# EAGLE board CT_schematic (EAGLE 7.6.0)

Size 100 x 80 mm. Coordinates in mm from the lower left corner, seen from the top.
Outline: 0,0 100,0 100,80 0,80 0,0
Copper layers (1*16): Top 0.035mm / dielectric 1.5mm / Bottom 0.035mm
Design rules "default": minimum track width 10mil, minimum drill 24mil, track to track 8mil, track to pad 8mil, pad to pad 8mil, via to via 8mil, smd to smd 8mil, copper to edge 40mil, drill to drill 8mil, minimum pad ring 10mil, minimum via ring 8mil, stop-mask expansion 4mil, vias tented up to drill 0mil, thermal gap 10mil

## Footprints (pad centres in the part's own frame; a part is rotated, then mirrored left to right if it is on the bottom)
C0603 = smd 0.8 x 0.8: 1 -0.762,0; 2 0.762,0
C0402 = smd 0.5 x 0.5: 1 -0.508,0; 2 0.508,0
C0805 = smd 1.2 x 1.3: 1 -1.016,0; 2 1.016,0
C1206 = smd 1.3 x 1.6: 1 -1.524,0; 2 1.524,0
C1210 = smd 1.2 x 2.5: 1 -1.524,0; 2 1.524,0
EXV-9H = smd 3.505 x 1.676: 1 -2.857,0; 2 2.857,0
L0603 = smd 0.8 x 0.8: 1 -0.762,0; 2 0.762,0
R0603 = smd 0.8 x 0.8: 1 -0.762,0; 2 0.762,0
L1210 = smd 1.2 x 2.5: 1 -1.524,0; 2 1.524,0
DR1040 = smd 1.6 x 3.2: 1 -4.458,0; 2 4.458,0
PJ-037B_PACKAGE = drill 3.7 square: 1 12,0 | drill 3.2 square: 2 6,0
UFBGA176 = smd 0.3 x 0.3: A1 0,0; A2 0.65,0; A3 1.3,0; A4 1.95,0; A5 2.6,0; A6 3.25,0; A7 3.9,0; A8 4.55,0; A9 5.2,0; A10 5.85,0; A11 6.5,0; A12 7.15,0; A13 7.8,0; A14 8.45,0; A15 9.1,0; B1 0,-0.65; B2 0.65,-0.65; B3 1.3,-0.65; B4 1.95,-0.65; B5 2.6,-0.65; B6 3.25,-0.65; B7 3.9,-0.65; B8 4.55,-0.65; B9 5.2,-0.65; B10 5.85,-0.65; B11 6.5,-0.65; B12 7.15,-0.65; B13 7.8,-0.65; B14 8.45,-0.65; B15 9.1,-0.65; C1 0,-1.3; C2 0.65,-1.3; C3 1.3,-1.3; C4 1.95,-1.3; C5 2.6,-1.3; C6 3.25,-1.3; C7 3.9,-1.3; C8 4.55,-1.3; C9 5.2,-1.3; C10 5.85,-1.3; C11 6.5,-1.3; C12 7.15,-1.3; C13 7.8,-1.3; C14 8.45,-1.3; C15 9.1,-1.3; D1 0,-1.95; D2 0.65,-1.95; D3 1.3,-1.95; D4 1.95,-1.95; D5 2.6,-1.95; D6 3.25,-1.95; D7 3.9,-1.95; D8 4.55,-1.95; D9 5.2,-1.95; D10 5.85,-1.95; D11 6.5,-1.95; D12 7.15,-1.95; D13 7.8,-1.95; D14 8.45,-1.95; D15 9.1,-1.95; E1 0,-2.6; E2 0.65,-2.6; E3 1.3,-2.6; E4 1.95,-2.6; E12 7.15,-2.6; E13 7.8,-2.6; E14 8.45,-2.6; E15 9.1,-2.6; F1 0,-3.25; F2 0.65,-3.25; F3 1.3,-3.25; F4 1.95,-3.25; F6 3.25,-3.25; F7 3.9,-3.25; F8 4.55,-3.25; F9 5.2,-3.25; F10 5.85,-3.25; F12 7.15,-3.25; F13 7.8,-3.25; F14 8.45,-3.25; F15 9.1,-3.25; G1 0,-3.9; G2 0.65,-3.9; G3 1.3,-3.9; G4 1.95,-3.9; G6 3.25,-3.9; G7 3.9,-3.9; G8 4.55,-3.9; G9 5.2,-3.9; G10 5.85,-3.9; G12 7.15,-3.9; G13 7.8,-3.9; G14 8.45,-3.9; G15 9.1,-3.9; H1 0,-4.55; H2 0.65,-4.55; H3 1.3,-4.55; H4 1.95,-4.55; H6 3.25,-4.55; H7 3.9,-4.55; H8 4.55,-4.55; H9 5.2,-4.55; H10 5.85,-4.55; H12 7.15,-4.55; H13 7.8,-4.55; H14 8.45,-4.55; H15 9.1,-4.55; J1 0,-5.2; J2 0.65,-5.2; J3 1.3,-5.2; J4 1.95,-5.2; J6 3.25,-5.2; J7 3.9,-5.2; J8 4.55,-5.2; J9 5.2,-5.2; J10 5.85,-5.2; J12 7.15,-5.2; J13 7.8,-5.2; J14 8.45,-5.2; J15 9.1,-5.2; K1 0,-5.85; K2 0.65,-5.85; K3 1.3,-5.85; K4 1.95,-5.85; K6 3.25,-5.85; K7 3.9,-5.85; K8 4.55,-5.85; K9 5.2,-5.85; K10 5.85,-5.85; K12 7.15,-5.85; K13 7.8,-5.85; K14 8.45,-5.85; K15 9.1,-5.85; L1 0,-6.5; L2 0.65,-6.5; L3 1.3,-6.5; L4 1.95,-6.5; L12 7.15,-6.5; L13 7.8,-6.5; L14 8.45,-6.5; L15 9.1,-6.5; M1 0,-7.15; M2 0.65,-7.15; M3 1.3,-7.15; M4 1.95,-7.15; M5 2.6,-7.15; M6 3.25,-7.15; M7 3.9,-7.15; M8 4.55,-7.15; M9 5.2,-7.15; M10 5.85,-7.15; M11 6.5,-7.15; M12 7.15,-7.15; M13 7.8,-7.15; M14 8.45,-7.15; M15 9.1,-7.15; N1 0,-7.8; N2 0.65,-7.8; N3 1.3,-7.8; N4 1.95,-7.8; N5 2.6,-7.8; N6 3.25,-7.8; N7 3.9,-7.8; N8 4.55,-7.8; N9 5.2,-7.8; N10 5.85,-7.8; N11 6.5,-7.8; N12 7.15,-7.8; N13 7.8,-7.8; N14 8.45,-7.8; N15 9.1,-7.8; P1 0,-8.45; P2 0.65,-8.45; P3 1.3,-8.45; P4 1.95,-8.45; P5 2.6,-8.45; P6 3.25,-8.45; P7 3.9,-8.45; P8 4.55,-8.45; P9 5.2,-8.45; P10 5.85,-8.45; P11 6.5,-8.45; P12 7.15,-8.45; P13 7.8,-8.45; P14 8.45,-8.45; P15 9.1,-8.45; R1 0,-9.1; R2 0.65,-9.1; R3 1.3,-9.1; R4 1.95,-9.1; R5 2.6,-9.1; R6 3.25,-9.1; R7 3.9,-9.1; R8 4.55,-9.1; R9 5.2,-9.1; R10 5.85,-9.1; R11 6.5,-9.1; R12 7.15,-9.1; R13 7.8,-9.1; R14 8.45,-9.1; R15 9.1,-9.1
SOIC-8 = smd 1.6 x 0.6: 1 -2.7,1.905 | smd 1.55 x 0.6: 2 -2.7,0.635; 3 -2.7,-0.635; 4 -2.7,-1.905; 5 2.7,-1.905; 6 2.7,-0.635; 7 2.7,0.635; 8 2.7,1.905
QFN-32 = smd 0.6 x 0.3: 1 -2.3,1.75; 2 -2.3,1.25; 3 -2.3,0.75; 4 -2.3,0.25; 5 -2.3,-0.25; 6 -2.3,-0.75; 7 -2.3,-1.25; 8 -2.3,-1.75; 17 2.3,-1.75; 18 2.3,-1.25; 19 2.3,-0.75; 20 2.3,-0.25; 21 2.3,0.25; 22 2.3,0.75; 23 2.3,1.25; 24 2.3,1.75 | smd 0.3 x 0.6: 9 -1.75,-2.3; 10 -1.25,-2.3; 11 -0.75,-2.3; 12 -0.25,-2.3; 13 0.25,-2.3; 14 0.75,-2.3; 15 1.25,-2.3; 16 1.75,-2.3; 25 1.75,2.3; 26 1.25,2.3; 27 0.75,2.3; 28 0.25,2.3; 29 -0.25,2.3; 30 -0.75,2.3; 31 -1.25,2.3; 32 -1.75,2.3 | smd 3.2 x 3.2: EXP 0,0
7498011122R = smd 0.71 x 2.29: 1 -3.545,-3.18; 2 -2.525,-3.18; 3 -1.505,-3.18; 4 -0.485,-3.18; 5 0.535,-3.18; 6 1.555,-3.18; 8 3.595,-3.18; 9 5.635,-3.18; 10 6.655,-3.18; 11 -6.605,-3.18; 12 -5.585,-3.18 | smd 1.4 x 2.54: 13 -8.51,10.2; 14 8.51,10.2 | hole 1.4: -3.5,0; 3.5,0
SSOP-16 = smd 1.981 x 0.356: 1 -2.464,2.223; 2 -2.464,1.587; 3 -2.464,0.953; 4 -2.464,0.318; 5 -2.464,-0.318; 6 -2.464,-0.953; 7 -2.464,-1.587; 8 -2.464,-2.223; 9 2.464,-2.223; 10 2.464,-1.587; 11 2.464,-0.953; 12 2.464,-0.318; 13 2.464,0.318; 14 2.464,0.953; 15 2.464,1.587; 16 2.464,2.223
HTSS-105-01-G-D = drill 1 pad 1.8 square: 1 0,0 | drill 1 pad 1.8: 2 0,2.54; 3 2.54,0; 4 2.54,2.54; 5 5.08,0; 6 5.08,2.54; 7 7.62,0; 8 7.62,2.54; 9 10.16,0; 10 10.16,2.54
VFBGA-63 = smd 0.4 x 0.4: A1 -3.6,4.4; A2 -2.8,4.4; A9 2.8,4.4; A10 3.6,4.4; B1 -3.6,3.6; B9 2.8,3.6; B10 3.6,3.6; C3 -2,2.8; C4 -1.2,2.8; C5 -0.4,2.8; C6 0.4,2.8; C7 1.2,2.8; C8 2,2.8; D3 -2,2; D4 -1.2,2; D5 -0.4,2; D6 0.4,2; D7 1.2,2; D8 2,2; E3 -2,1.2; E4 -1.2,1.2; E5 -0.4,1.2; E6 0.4,1.2; E7 1.2,1.2; E8 2,1.2; F3 -2,0.4; F4 -1.2,0.4; F5 -0.4,0.4; F6 0.4,0.4; F7 1.2,0.4; F8 2,0.4; G3 -2,-0.4; G4 -1.2,-0.4; G5 -0.4,-0.4; G6 0.4,-0.4; G7 1.2,-0.4; G8 2,-0.4; H3 -2,-1.2; H4 -1.2,-1.2; H5 -0.4,-1.2; H6 0.4,-1.2; H7 1.2,-1.2; H8 2,-1.2; J3 -2,-2; J4 -1.2,-2; J5 -0.4,-2; J6 0.4,-2; J7 1.2,-2; J8 2,-2; K3 -2,-2.8; K4 -1.2,-2.8; K5 -0.4,-2.8; K6 0.4,-2.8; K7 1.2,-2.8; K8 2,-2.8; L1 -3.6,-3.6; L2 -2.8,-3.6; L9 2.8,-3.6; L10 3.6,-3.6; M1 -3.6,-4.4; M2 -2.8,-4.4; M9 2.8,-4.4; M10 3.6,-4.4
SJ-43515TS-SMT-TR = smd 2.2 x 3: 1 0.6,-7.4; 4 3.4,-7.4 | smd 3 x 3: 2 12.8,-7.4; 5 17,-3 | smd 2 x 3: 3 5.3,0; 6 2.5,0 | drill 1.8: P$7 4.5,-3.69; P$8 11.54,-3.69
WM-64PC = drill 0.6 pad 1: 1 -1,0.95; 2 -1,-0.95
ABLS-25.000MHZ-B2F-T = smd 5.6 x 2.8: 1 -3.81,0; 2 5.69,0
ASEK = smd 1.4 x 1: 1 -1.1,-0.8; 2 1.1,-0.8; 3 1.1,0.8; 4 -1.1,0.8
ASFL1 = smd 1.7 x 1.5: 1 -1.27,-1.1; 2 1.27,-1.1; 3 1.27,1.1; 4 -1.27,1.1
IDT74FCT38072 = smd 0.51 x 1: 1 0,0; 2 1.27,0; 3 2.54,0; 4 3.81,0; 5 3.81,4.95; 6 2.54,4.95; 7 1.27,4.95; 8 0,4.95
WSON-8 = smd 0.3 x 0.6: 1 -0.75,0; 2 0.05,0; 3 0.85,0; 4 1.65,0; 5 1.65,3.8; 6 0.85,3.8; 7 0.05,3.8; 8 -0.75,3.8 | smd 3 x 2.6: PAD 0.45,1.9
HTSSOP14 = smd 1.676 x 0.356: 1 -2.8,1.95; 2 -2.8,1.3; 3 -2.8,0.65; 4 -2.8,0; 5 -2.8,-0.65; 6 -2.8,-1.3; 7 -2.8,-1.95; 8 2.8,-1.95; 9 2.8,-1.3; 10 2.8,-0.65; 11 2.8,0; 12 2.8,0.65; 13 2.8,1.3; 14 2.8,1.95 | smd 3 x 5: 15 0,0 | drill 0.4 pad 0.45: P$1 -0.75,1.5; P$2 0.75,1.5; P$3 -0.75,0; P$4 0.8,0; P$5 -0.75,-1.5; P$6 0.9,-1.5
SON-6 = smd 0.55 x 0.3: 1 -0.355,0.5 | smd 0.52 x 0.3: 2 -0.37,0; 3 -0.37,-0.5; 4 0.37,-0.5; 5 0.37,0; 6 0.37,0.5
SW_4-1437565-2 = smd 1.4 x 2.1: 1 -2.23,4.55; 2 -2.23,-4.55; 3 2.23,4.55; 4 2.23,-4.55
LGM67K-G1J2-24-Z = smd 0.8 x 1.4: A -2,0; C 0,0
NC7SZ125M5X = smd 1.3 x 0.7: 1 -1.3,0.95; 2 -1.3,0; 3 -1.3,-0.95; 4 1.3,-0.95; 5 1.3,0.95

## Placement (x,y rotation side)
C1  1e-06  [C0603]  -72.39,90.17 0 top  (outside the outline)
C2  1e-07  [C0603]  -76.2,90.17 0 top  (outside the outline)
C3  1e-07  [C0603]  -80.01,90.17 0 top  (outside the outline)
C4  1e-07  [C0603]  -83.82,90.17 0 top  (outside the outline)
C5  1e-07  [C0603]  -87.63,90.17 0 top  (outside the outline)
C6  1e-07  [C0603]  -91.44,90.17 0 top  (outside the outline)
C7  1e-07  [C0603]  -95.25,90.17 0 top  (outside the outline)
C8  1e-07  [C0603]  -15.24,95.25 0 top  (outside the outline)
C9  1e-07  [C0603]  -19.05,95.25 0 top  (outside the outline)
C10  1e-07  [C0603]  -22.86,95.25 0 top  (outside the outline)
C11  1e-07  [C0603]  -26.67,95.25 0 top  (outside the outline)
C12  1e-07  [C0603]  -30.48,95.25 0 top  (outside the outline)
C13  1e-07  [C0603]  -34.29,95.25 0 top  (outside the outline)
C14  1e-07  [C0603]  -38.1,95.25 0 top  (outside the outline)
C15  1e-07  [C0603]  -41.91,95.25 0 top  (outside the outline)
C16  1e-07  [C0603]  -45.72,95.25 0 top  (outside the outline)
C17  4.7e-06  [C0603]  -49.53,90.17 0 top  (outside the outline)
C18  1e-08  [C0603]  -49.53,95.25 0 top  (outside the outline)
C19  1e-06  [C0603]  -53.34,95.25 0 top  (outside the outline)
C20  1e-07  [C0603]  -57.15,95.25 0 top  (outside the outline)
C21  2.2e-06  [C0603]  -53.34,90.17 0 top  (outside the outline)
C22  2.2e-06  [C0603]  -57.15,90.17 0 top  (outside the outline)
C23  1e-11  [C0402]  -50.8,105.41 0 top  (outside the outline)
C24  1e-11  [C0402]  -54.61,105.41 0 top  (outside the outline)
C25  1e-08  [C0402]  -58.42,105.41 0 top  (outside the outline)
C26  1e-07  [C0402]  -62.23,105.41 0 top  (outside the outline)
C27  1e-07  [C0402]  -66.04,105.41 0 top  (outside the outline)
C28  2.2e-06  [C0603]  -60.96,90.17 0 top  (outside the outline)
C29  1e-07  [C0402]  -69.85,105.41 0 top  (outside the outline)
C30  1e-07  [C0402]  -73.66,105.41 0 top  (outside the outline)
C31  1e-05  [C0805]  -21.59,83.82 0 top  (outside the outline)
C32  1e-07  [C0402]  -77.47,105.41 0 top  (outside the outline)
C33  1e-06  [C0603]  -60.96,95.25 0 top  (outside the outline)
C34  1e-06  [C0603]  -64.77,95.25 0 top  (outside the outline)
C35  2.2e-07  [C0603]  -64.77,90.17 0 top  (outside the outline)
C36  1e-06  [C0603]  -68.58,95.25 0 top  (outside the outline)
C37  1e-06  [C0603]  -72.39,95.25 0 top  (outside the outline)
C38  1e-07  [C0402]  -81.28,105.41 0 top  (outside the outline)
C39  1e-07  [C0402]  -85.09,105.41 0 top  (outside the outline)
C40  1e-07  [C0402]  -88.9,105.41 0 top  (outside the outline)
C41  1e-07  [C0402]  -92.71,105.41 0 top  (outside the outline)
C42  2.2e-06  [C0603]  -68.58,90.17 0 top  (outside the outline)
C43  1e-06  [C0603]  -76.2,95.25 0 top  (outside the outline)
C44  1e-06  [C0603]  -80.01,95.25 0 top  (outside the outline)
C45  1e-06  [C0603]  -83.82,95.25 0 top  (outside the outline)
C46  1e-06  [C0603]  -87.63,95.25 0 top  (outside the outline)
C47  1e-06  [C0603]  -91.44,95.25 0 top  (outside the outline)
C48  1e-06  [C0603]  -95.25,95.25 0 top  (outside the outline)
C49  1e-06  [C0603]  -15.24,100.33 0 top  (outside the outline)
C50  1e-07  [C0402]  -96.52,105.41 0 top  (outside the outline)
C51  1e-07  [C0402]  -15.24,110.49 0 top  (outside the outline)
C52  1e-07  [C0402]  -19.05,110.49 0 top  (outside the outline)
C53  1e-07  [C0402]  -22.86,110.49 0 top  (outside the outline)
C54  1e-06  [C0603]  -19.05,100.33 0 top  (outside the outline)
C55  1e-08  [C0402]  -26.67,110.49 0 top  (outside the outline)
C56  1e-08  [C0402]  -30.48,110.49 0 top  (outside the outline)
C57  1e-08  [C0402]  -34.29,110.49 0 top  (outside the outline)
C58  1e-08  [C0402]  -38.1,110.49 0 top  (outside the outline)
C59  1e-08  [C0402]  -41.91,110.49 0 top  (outside the outline)
C60  1e-05  [C1206]  -77.47,76.2 0 top  (outside the outline)
C61  1e-05  [C0805]  -26.67,83.82 0 top  (outside the outline)
C62  1e-06  [C0603]  -22.86,100.33 0 top  (outside the outline)
C63  3.3e-09  [C0402]  -46.99,105.41 0 top  (outside the outline)
C64  1e-07  [C0402]  -45.72,110.49 0 top  (outside the outline)
C65  2.2e-05  [C1210]  -58.42,76.2 0 top  (outside the outline)
C66  2.2e-05  [C1210]  -64.77,76.2 0 top  (outside the outline)
C67  1e-05  [C1206]  -83.82,76.2 0 top  (outside the outline)
C68  1e-05  [C1206]  -90.17,76.2 0 top  (outside the outline)
C69  1e-07  [C0402]  -49.53,110.49 0 top  (outside the outline)
C70  0.0001  [EXV-9H]  -73.66,67.31 0 top  (outside the outline)
C71  0.0001  [EXV-9H]  -85.09,67.31 0 top  (outside the outline)
C72  1e-08  [C0402]  -53.34,110.49 0 top  (outside the outline)
C73  1e-08  [C0402]  -57.15,110.49 0 top  (outside the outline)
F1  240.0  [L0603]  -26.67,100.33 0 top  (outside the outline)
I1  97.0  [R0603]  -30.48,100.33 0 top  (outside the outline)
I5  1e-05  [L1210]  -71.12,76.2 0 top  (outside the outline)
I6  5.2e-06  [DR1040]  -19.05,48.26 0 top  (outside the outline)
J1  PJ-037B  [PJ-037B_PACKAGE]  -55.88,35.56 0 top  (outside the outline)
R2  1000.0  [R0603]  -34.29,100.33 0 top  (outside the outline)
R7  4700.0  [R0603]  -38.1,100.33 0 top  (outside the outline)
R8  4700.0  [R0603]  -41.91,100.33 0 top  (outside the outline)
R9  2200.0  [R0603]  -45.72,100.33 0 top  (outside the outline)
R11  2200.0  [R0603]  -49.53,100.33 0 top  (outside the outline)
R13  10000.0  [R0603]  -60.96,83.82 0 top  (outside the outline)
R14  10000.0  [R0603]  -66.04,83.82 0 top  (outside the outline)
R15  10000.0  [R0603]  -71.12,83.82 0 top  (outside the outline)
R16  10000.0  [R0603]  -76.2,83.82 0 top  (outside the outline)
R17  10000.0  [R0603]  -81.28,83.82 0 top  (outside the outline)
R18  10000.0  [R0603]  -86.36,83.82 0 top  (outside the outline)
R19  10000.0  [R0603]  -91.44,83.82 0 top  (outside the outline)
R20  0.1  [R0603]  -53.34,100.33 0 top  (outside the outline)
R21  0.1  [R0603]  -57.15,100.33 0 top  (outside the outline)
R22  200.0  [R0603]  -60.96,100.33 0 top  (outside the outline)
R23  220.0  [R0603]  -64.77,100.33 0 top  (outside the outline)
R24  6490.0  [R0603]  -68.58,100.33 0 top  (outside the outline)
R25  4700.0  [R0603]  -72.39,100.33 0 top  (outside the outline)
R26  4700.0  [R0603]  -76.2,100.33 0 top  (outside the outline)
R27  4700.0  [R0603]  -80.01,100.33 0 top  (outside the outline)
R28  4700.0  [R0603]  -83.82,100.33 0 top  (outside the outline)
R29  1000.0  [R0603]  -87.63,100.33 0 top  (outside the outline)
R30  4700.0  [R0603]  -91.44,100.33 0 top  (outside the outline)
R31  1000.0  [R0603]  -95.25,100.33 0 top  (outside the outline)
R32  1000.0  [R0603]  -15.24,105.41 0 top  (outside the outline)
R33  1000.0  [R0603]  -19.05,105.41 0 top  (outside the outline)
R34  1000.0  [R0603]  -22.86,105.41 0 top  (outside the outline)
R35  100000.0  [R0603]  -40.64,83.82 0 top  (outside the outline)
R36  10000.0  [R0603]  -96.52,83.82 0 top  (outside the outline)
R37  10000.0  [R0603]  -15.24,90.17 0 top  (outside the outline)
R38  10000.0  [R0603]  -20.32,90.17 0 top  (outside the outline)
R39  10000.0  [R0603]  -25.4,90.17 0 top  (outside the outline)
R40  10000.0  [R0603]  -30.48,90.17 0 top  (outside the outline)
R41  1270.0  [R0603]  -26.67,105.41 0 top  (outside the outline)
R42  1270.0  [R0603]  -30.48,105.41 0 top  (outside the outline)
R43  100000.0  [R0603]  -45.72,83.82 0 top  (outside the outline)
R44  200.0  [R0603]  -34.29,105.41 0 top  (outside the outline)
R45  1000.0  [R0603]  -38.1,105.41 0 top  (outside the outline)
R46  71007.101651032  [R0603]  -35.56,83.82 0 top  (outside the outline)
R47  22000.0  [R0603]  -35.56,90.17 0 top  (outside the outline)
R48  10000.0  [R0603]  -40.64,90.17 0 top  (outside the outline)
R49  10000.0  [R0603]  -45.72,90.17 0 top  (outside the outline)
R50  9100.0  [R0603]  -41.91,105.41 0 top  (outside the outline)
R51  680000.0  [R0603]  -50.8,83.82 0 top  (outside the outline)
R52  120000.0  [R0603]  -55.88,83.82 0 top  (outside the outline)
U1  STM32F469IIH6  [UFBGA176]  -96.52,38.1 0 top  (outside the outline)
U2  AT25020B-SSHL-T  [SOIC-8]  -43.18,58.42 0 top  (outside the outline)
U3  KSZ8081RNBIA-TR  [QFN-32]  -67.31,48.26 0 top  (outside the outline)
U4  7498011122R  [7498011122R]  -22.86,7.62 0 top  (outside the outline)
U5  LTC2804CGN-1#PBF  [SSOP-16]  -40.64,48.26 0 top  (outside the outline)
U6  HTSS-105-01-G-D  [HTSS-105-01-G-D]  -27.94,57.15 0 top  (outside the outline)
U7  mt29f4g08abadah4  [VFBGA-63]  -62.23,34.29 0 top  (outside the outline)
U8  SGTL5000XNAA3  [QFN-32]  -82.55,48.26 0 top  (outside the outline)
U9  SJ-43515TS-SMT-TR  [SJ-43515TS-SMT-TR]  -58.42,10.16 0 top  (outside the outline)
U10  SJ-43515TS-SMT-TR  [SJ-43515TS-SMT-TR]  -86.36,10.16 0 top  (outside the outline)
U11  SJ-43515TS-SMT-TR  [SJ-43515TS-SMT-TR]  -39.37,38.1 0 top  (outside the outline)
U12  WM-64PCT  [WM-64PC]  -52.07,48.26 0 top  (outside the outline)
U13  ABLS-25.000MHZ-B2F-T  [ABLS-25.000MHZ-B2F-T]  -26.67,77.47 0 top  (outside the outline)
U14  ASEK-32.768KHz-ECST  [ASEK]  -64.77,67.31 0 top  (outside the outline)
U15  ASFL-24.57MHZ-NCS  [ASFL1]  -82.55,58.42 0 top  (outside the outline)
U16  ASFL1-50MHZ-NCS  [ASFL1]  -26.67,68.58 0 top  (outside the outline)
U17  idt74fct38072  [IDT74FCT38072]  -46.99,64.77 0 top  (outside the outline)
U18  LP3878SDX-ADJ/NOPB  [WSON-8]  -64.77,57.15 0 top  (outside the outline)
U19  tps54225PWP  [HTSSOP14]  -38.1,76.2 0 top  (outside the outline)
U20  TPS3895ADRYR  [SON-6]  -59.69,109.22 0 top  (outside the outline)
U21  4-1437565-2  [SW_4-1437565-2]  -82.55,34.29 0 top  (outside the outline)
U22  Q65110A2395  [LGM67K-G1J2-24-Z]  -46.99,76.2 0 top  (outside the outline)
U23  nc7sz125m5x  [NC7SZ125M5X]  -95.25,74.93 0 top  (outside the outline)
U24  nc7sz125m5x  [NC7SZ125M5X]  -15.24,83.82 0 top  (outside the outline)

## Library data of the parts
C1-C73 F1 I1 I5 I6 J1 R2 R7-R9 R11 R13-R52 U1-U24 = circuit_tree

## Nets
CLK_CRYSTAL_U1_G1: C23.1 U1.G1 U13.1
CLK_CRYSTAL_U1_H1: C24.1 U1.H1 U13.2
CLK_U1_E1: U1.E1 U14.3
CLK_U1_N2: U1.N2 U17.7
CLK_U3_9: U3.9 U17.6
CLK_U8_21: U8.21 U15.3
CLK_U17_3: U16.3 U17.3
GND: C1.2 C2.2 C3.2 C4.2 C5.2 C6.2 C7.2 C8.2 C9.2 C10.2 C11.2 C12.2 C13.2 C14.2 C15.2 C16.2 C17.2 C18.2 C19.2 C20.2 C21.2 C22.2 C23.2 C24.2 C25.2 C26.2 C27.2 C28.2 C29.2 C30.2 C31.2 C32.2 C33.2 C34.2 C36.2 C37.2 C38.2 C39.2 C40.2 C41.2 C42.2 C50.2 C51.2 C52.2 C53.2 C54.2 C55.2 C56.2 C57.2 C58.2 C59.2 C60.2 C61.2 C62.2 C63.2 C65.2 C66.2 C67.2 C68.2 C69.2 C70.2 C71.2 C72.2 C73.2 J1.2 R2.2 R15.2 R16.2 R20.2 R21.2 R24.2 R26.2 R29.2 R31.2 R32.2 R33.2 R34.2 R42.2 R45.2 R47.2 R50.2 R52.2 U1.D5 U1.D7 U1.D8 U1.D9 U1.F2 U1.F6 U1.F7 U1.F8 U1.F9 U1.F10 U1.F12 U1.G2 U1.G6 U1.G7 U1.G8 U1.G9 U1.G10 U1.G12 U1.H6 U1.H7 U1.H8 U1.H9 U1.H10 U1.H12 U1.J6 U1.J7 U1.J8 U1.J9 U1.J10 U1.K6 U1.K7 U1.K8 U1.K9 U1.K10 U1.M1 U1.M8 U1.M9 U1.N1 U2.4 U3.1 U3.EXP U4.1 U4.10 U5.8 U6.9 U7.C5 U7.F7 U7.K3 U7.K8 U8.1 U8.3 U8.7 U8.EXP U10.1 U11.1 U12.2 U14.2 U15.2 U16.2 U17.4 U17.5 U17.8 U18.3 U18.PAD U19.5 U19.8 U19.9 U19.15 U20.2 U22.C U23.1 U23.3 U24.1 U24.3
NET_U1_C6: R13.1 U1.C6
NET_U1_D6: R14.1 U1.D6
NET_U1_D13: U1.D13
NET_U1_F13: C22.1 U1.F13
NET_U1_J1: R8.1 U1.J1 U24.4
NET_U1_K12: U1.K12
NET_U1_L4: R16.1 U1.L4
NET_U1_M3: R9.1 U1.M3 U3.12
NET_U1_M6: R15.1 U1.M6
NET_U1_M10: C21.1 U1.M10
NET_U1_P2: R11.1 U1.P2 U3.11
NET_U1_R1: C18.1 C19.1 F1.1 U1.P1 U1.R1
NET_U1_R14: U22.A
NET_U1_R15: U21.3 U21.4
NET_U2_3: R17.1 U2.3
NET_U2_7: R19.1 U2.7
NET_U3_2: C28.1 C29.1 U3.2
NET_U3_3: C30.1 I1.1 U3.3
NET_U3_10: R24.1 U3.10
NET_U3_13: R27.1 U3.13
NET_U3_14: R28.1 U3.14
NET_U3_19: R26.1 U3.19
NET_U3_20: R32.1 U3.20
NET_U3_21: R25.1 U3.21
NET_U3_28: R30.1 U3.28
NET_U3_29: R31.1 U3.29
NET_U3_31: R33.1 U3.31
NET_U3_32: R7.1 U3.32 U23.4
NET_U4_1: U3.7 U4.1
NET_U4_2: C26.1 U4.2
NET_U4_3: U3.6 U4.3
NET_U4_4: U3.5 U4.4
NET_U4_5: C27.1 U4.5
NET_U4_6: U3.4 U4.6
NET_U4_8: R21.1 U4.8
NET_U4_9: R22.1 U4.9
NET_U4_12: R23.1 U4.12
NET_U4_13: R20.1 U4.13 U4.14
NET_U4_30: R22.2
NET_U4_31: R23.2
NET_U5_6: C33.1 U5.6
NET_U5_7: C35.1 I5.2 U5.7
NET_U5_9: C34.1 U5.9
NET_U5_10: C35.2 U5.10
NET_U5_11: R35.1 U5.11
NET_U6_3: U5.1 U6.3
NET_U6_4: U5.2 U6.4
NET_U6_5: U5.3 U6.5
NET_U6_6: U5.4 U6.6
NET_U7_C3: R40.1 U7.C3
NET_U8_10: C53.1 U8.10
NET_U8_29: R41.1 U8.29
NET_U8_31: R42.1 U8.31
NET_U9_1: U8.4 U9.1
NET_U9_2: U8.2 U9.2
NET_U9_5: U8.6 U9.5
NET_U10_2: C44.1 U10.2
NET_U10_5: C43.1 U10.5
NET_U10_11: C44.2
NET_U10_12: C43.2
NET_U11_2: C46.1 C47.1 U11.2
NET_U11_5: C45.1 U11.5
NET_U11_13: C46.2 C47.2
NET_U11_14: C45.2
NET_U12_1: C48.1 C49.1 C54.1 U8.16 U12.1
NET_U12_15: C48.2 C49.2
NET_U18_1: C59.1 U18.1
NET_U18_6: R44.2 R45.1 U18.6
NET_U18_8: R43.1 U18.8
NET_U19_2: R46.2 R47.1 U19.2
NET_U19_3: C62.1 U19.3
NET_U19_4: C63.1 U19.4
NET_U19_10: C64.1 I6.1 U19.10 U19.11
NET_U19_12: C64.2 U19.12
NET_U20_1: R49.1 R50.1 U20.1
NET_U20_3: R51.2 R52.1 U20.3
NET_U20_4: R48.1 U20.4 U23.2 U24.2
NET_U21_1: R2.1 U21.1 U21.2
PROC_ETH_CRS_DV: U1.R3 U3.18
PROC_ETH_RXD0: R34.1 U1.N5 U3.16
PROC_ETH_RXD1: R29.1 U1.P5 U3.15
PROC_ETH_TX_EN: U1.B9 U3.23
PROC_ETH_TXD0: U1.A8 U3.24
PROC_ETH_TXD1: U1.A7 U3.25
PROC_FMC_A16: U1.N14 U7.D5
PROC_FMC_A17: U1.N13 U7.C4
PROC_FMC_D0: U1.M14 U7.H4
PROC_FMC_D1: U1.L14 U7.J4
PROC_FMC_D2: U1.B12 U7.K4
PROC_FMC_D3: U1.C12 U7.K5
PROC_FMC_D4: U1.R8 U7.K6
PROC_FMC_D5: U1.P8 U7.J7
PROC_FMC_D6: U1.P9 U7.K7
PROC_FMC_D7: U1.R9 U7.J8
PROC_FMC_INT: R36.1 U1.J14 U7.C8
PROC_FMC_NCE: R37.1 U1.C10 U7.C6
PROC_FMC_NOE: R39.1 U1.D10 U7.D4
PROC_FMC_NWE: R38.1 U1.C11 U7.C7
PROC_I2S2_CK: U1.D11 U8.24
PROC_I2S2_EXT_SD: U1.M4 U8.25
PROC_I2S2_SD: U1.C13 U8.26
PROC_I2S2_WS: U1.B4 U8.23
PROC_SPI1_MISO: U1.A9 U2.2
PROC_SPI1_MOSI: U1.A6 U2.5
PROC_SPI1_NSS: R18.1 U1.A13 U2.1
PROC_SPI1_SCK: U1.A10 U2.6
PROC_UART4_RX: U1.B13 U5.16
PROC_UART4_TX: U1.B14 U5.14
VCC_S1_7V4: C60.1 C67.1 C68.1 C70.1 C71.1 J1.1 R43.2 U18.4 U19.7 U19.13 U19.14
VCC_TIER1_1V2: C50.1 C61.1 R44.1 U8.30 U18.5
VCC_TIER1_3V3: C1.1 C2.1 C3.1 C4.1 C5.1 C6.1 C7.1 C8.1 C9.1 C10.1 C11.1 C12.1 C13.1 C14.1 C15.1 C16.1 C17.1 C20.1 C25.1 C31.1 C32.1 C36.1 C37.1 C38.1 C39.1 C40.1 C41.1 C42.1 C51.1 C52.1 C55.1 C56.1 C57.1 C58.1 C65.1 C66.1 C69.1 C72.1 C73.1 F1.2 I1.2 I5.1 I6.2 R7.2 R8.2 R9.2 R11.2 R13.2 R14.2 R17.2 R18.2 R19.2 R25.2 R27.2 R28.2 R30.2 R35.2 R36.2 R37.2 R38.2 R39.2 R40.2 R41.2 R46.1 R48.2 R49.2 R51.1 U1.C1 U1.C5 U1.C7 U1.C8 U1.C9 U1.F3 U1.G3 U1.G13 U1.H13 U1.J12 U1.J13 U1.K4 U1.N8 U1.N9 U1.N10 U2.8 U3.17 U5.5 U5.12 U7.D3 U7.G4 U7.H8 U7.J6 U8.5 U8.20 U14.4 U15.4 U16.4 U17.1 U17.2 U19.1 U20.6 U23.5 U24.5

## Tracks (layer width: path | path; a pad name or v marks a point on that pad's centre or on a via)
CLK_CRYSTAL_U1_G1  (2 unrouted)
CLK_CRYSTAL_U1_H1  (2 unrouted)
CLK_U1_E1  (1 unrouted)
CLK_U1_N2  (1 unrouted)
CLK_U3_9  (1 unrouted)
CLK_U8_21  (1 unrouted)
CLK_U17_3  (1 unrouted)
GND  (155 unrouted)
NET_U1_C6  (1 unrouted)
NET_U1_D6  (1 unrouted)
NET_U1_F13  (1 unrouted)
NET_U1_J1  (2 unrouted)
NET_U1_L4  (1 unrouted)
NET_U1_M3  (2 unrouted)
NET_U1_M6  (1 unrouted)
NET_U1_M10  (1 unrouted)
NET_U1_P2  (2 unrouted)
NET_U1_R1  (4 unrouted)
NET_U1_R15  (1 unrouted)
NET_U2_3  (1 unrouted)
NET_U2_7  (1 unrouted)
NET_U3_2  (2 unrouted)
NET_U3_3  (2 unrouted)
NET_U3_10  (1 unrouted)
NET_U3_13  (1 unrouted)
NET_U3_14  (1 unrouted)
NET_U3_19  (1 unrouted)
NET_U3_20  (1 unrouted)
NET_U3_21  (1 unrouted)
NET_U3_28  (1 unrouted)
NET_U3_29  (1 unrouted)
NET_U3_31  (1 unrouted)
NET_U3_32  (2 unrouted)
NET_U4_1  (1 unrouted)
NET_U4_2  (1 unrouted)
NET_U4_3  (1 unrouted)
NET_U4_4  (1 unrouted)
NET_U4_5  (1 unrouted)
NET_U4_6  (1 unrouted)
NET_U4_8  (1 unrouted)
NET_U4_9  (1 unrouted)
NET_U4_12  (1 unrouted)
NET_U4_13  (2 unrouted)
NET_U5_6  (1 unrouted)
NET_U5_7  (2 unrouted)
NET_U5_9  (1 unrouted)
NET_U5_10  (1 unrouted)
NET_U5_11  (1 unrouted)
NET_U6_3  (1 unrouted)
NET_U6_4  (1 unrouted)
NET_U6_5  (1 unrouted)
NET_U6_6  (1 unrouted)
NET_U7_C3  (1 unrouted)
NET_U8_10  (1 unrouted)
NET_U8_29  (1 unrouted)
NET_U8_31  (1 unrouted)
NET_U9_1  (1 unrouted)
NET_U9_2  (1 unrouted)
NET_U9_5  (1 unrouted)
NET_U10_2  (1 unrouted)
NET_U10_5  (1 unrouted)
NET_U11_2  (2 unrouted)
NET_U11_5  (1 unrouted)
NET_U11_13  (1 unrouted)
NET_U12_1  (4 unrouted)
NET_U12_15  (1 unrouted)
NET_U18_1  (1 unrouted)
NET_U18_6  (2 unrouted)
NET_U18_8  (1 unrouted)
NET_U19_2  (2 unrouted)
NET_U19_3  (1 unrouted)
NET_U19_4  (1 unrouted)
NET_U19_10  (3 unrouted)
NET_U19_12  (1 unrouted)
NET_U20_1  (2 unrouted)
NET_U20_3  (2 unrouted)
NET_U20_4  (3 unrouted)
NET_U21_1  (2 unrouted)
PROC_ETH_CRS_DV  (1 unrouted)
PROC_ETH_RXD0  (2 unrouted)
PROC_ETH_RXD1  (2 unrouted)
PROC_ETH_TX_EN  (1 unrouted)
PROC_ETH_TXD0  (1 unrouted)
PROC_ETH_TXD1  (1 unrouted)
PROC_FMC_A16  (1 unrouted)
PROC_FMC_A17  (1 unrouted)
PROC_FMC_D0  (1 unrouted)
PROC_FMC_D1  (1 unrouted)
PROC_FMC_D2  (1 unrouted)
PROC_FMC_D3  (1 unrouted)
PROC_FMC_D4  (1 unrouted)
PROC_FMC_D5  (1 unrouted)
PROC_FMC_D6  (1 unrouted)
PROC_FMC_D7  (1 unrouted)
PROC_FMC_INT  (2 unrouted)
PROC_FMC_NCE  (2 unrouted)
PROC_FMC_NOE  (2 unrouted)
PROC_FMC_NWE  (2 unrouted)
PROC_I2S2_CK  (1 unrouted)
PROC_I2S2_EXT_SD  (1 unrouted)
PROC_I2S2_SD  (1 unrouted)
PROC_I2S2_WS  (1 unrouted)
PROC_SPI1_MISO  (1 unrouted)
PROC_SPI1_MOSI  (1 unrouted)
PROC_SPI1_NSS  (2 unrouted)
PROC_SPI1_SCK  (1 unrouted)
PROC_UART4_RX  (1 unrouted)
PROC_UART4_TX  (1 unrouted)
VCC_S1_7V4  (10 unrouted)
VCC_TIER1_1V2  (4 unrouted)
VCC_TIER1_3V3  (100 unrouted)